# EAGLE board room-therm.0.1.2 (EAGLE 7.6.0)
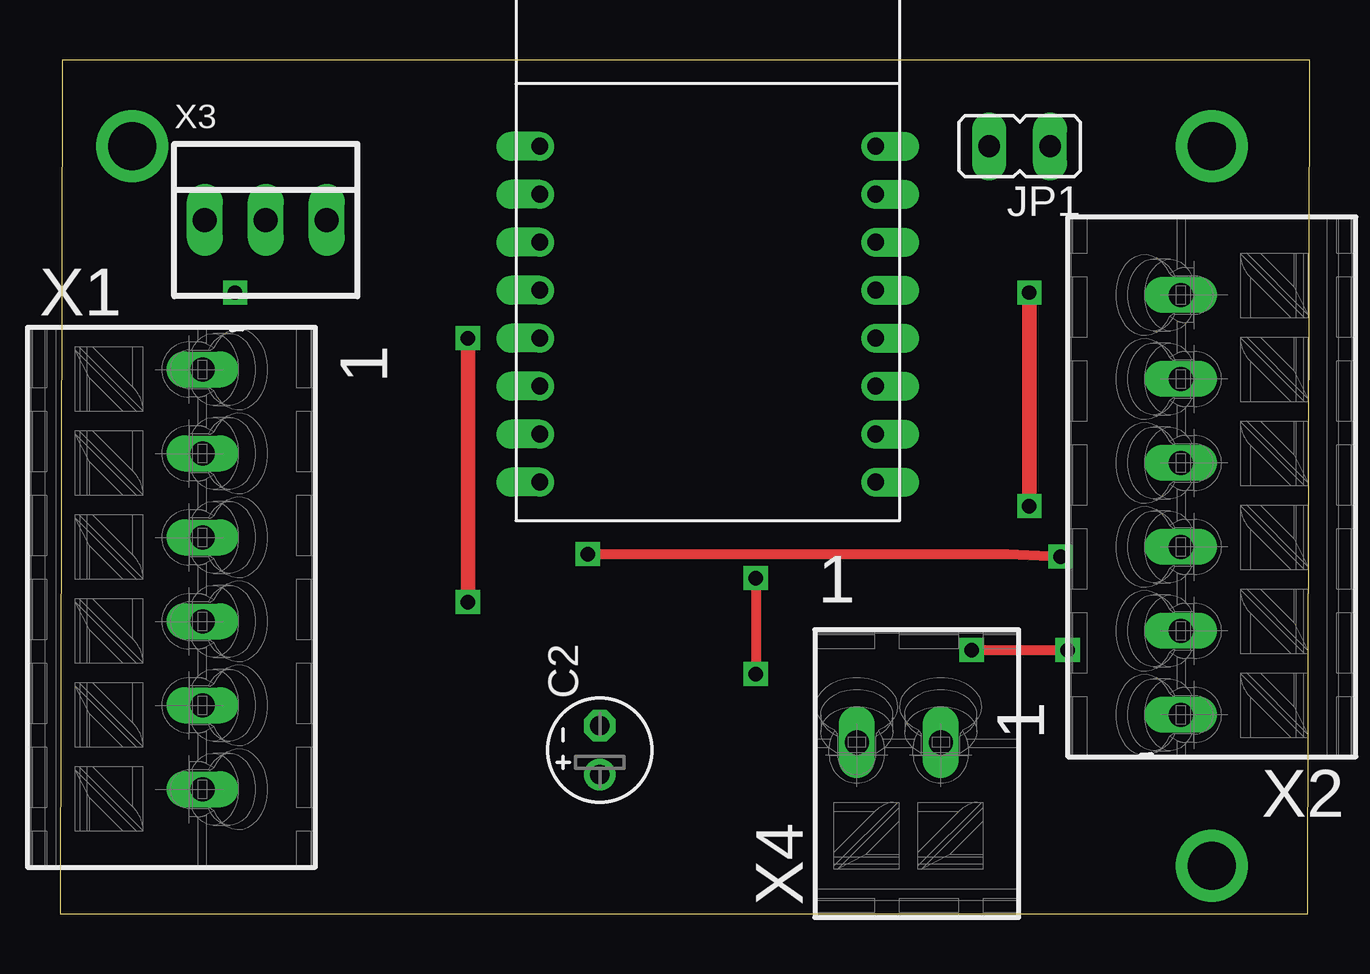
[diagram p0: board, top side]
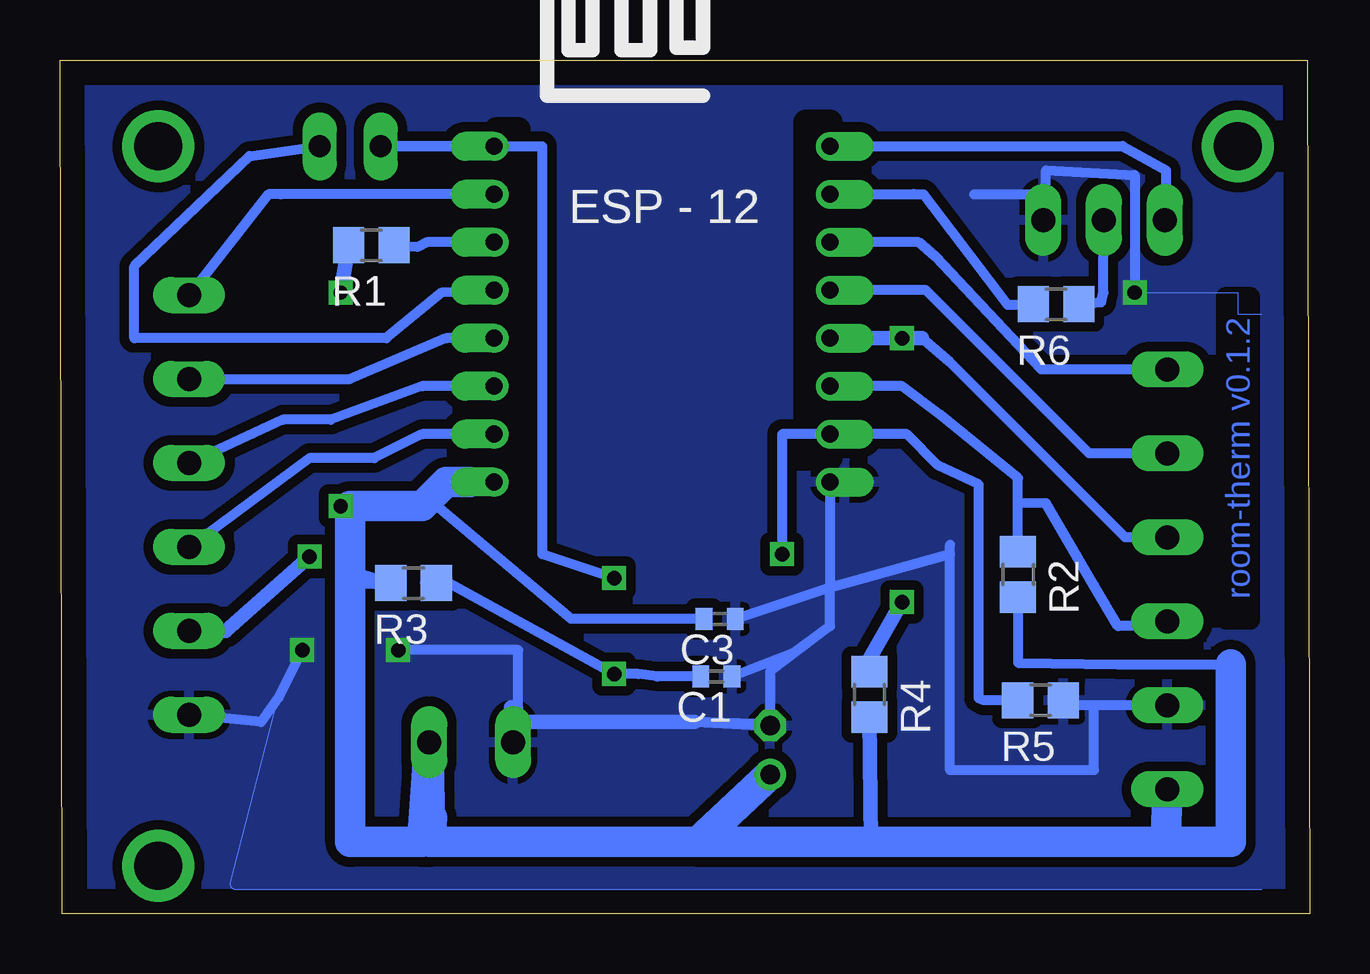
[diagram p1: board, bottom side, seen from below]

Size 52.1 x 35.6 mm. Coordinates in mm from the lower left corner, seen from the top.
Outline: 0,0 52,0 52.1,35.6 0.1,35.6 0,0
Copper layers (1*16): Top 0.035mm / dielectric 1.5mm / Bottom 0.035mm
Design rules "default *": minimum track width 10mil, minimum drill 0.5mm, track to track 8mil, track to pad 8mil, pad to pad 8mil, via to via 8mil, smd to smd 8mil, copper to edge 40mil, drill to drill 8mil, minimum pad ring 10mil, minimum via ring 8mil, stop-mask expansion 4mil, vias tented up to drill 0mil, thermal gap 10mil
bRestrict: area 20,19 to 21,33; area 33,17 to 34,32.7

## Footprints (pad centres in the part's own frame; a part is rotated, then mirrored left to right if it is on the bottom)
C1005 = smd 0.7 x 0.9: 1 -0.65,0; 2 0.65,0
E2-4 = drill 0.813 pad 1.27: + -1.016,0 | drill 0.813 pad 1.27 octagon: - 1.016,0
JP1 = drill 0.914 long: 1 0,-1.27; 2 0,1.27
R0805 = smd 1.3 x 1.5: 1 -0.95,0; 2 0.95,0
ESP12 = drill 0.7 offset: ADC -7.1,3.8; CH_PD -7.1,1.8; GND 6.9,-8.2; GPIO0 6.9,-2.2; GPIO2 6.9,-4.2; GPIO4 6.9,1.8; GPIO5 6.9,-0.2; GPIO12 -7.1,-4.2; GPIO13 -7.1,-6.2; GPIO14 -7.1,-2.2; GPIO15 6.9,-6.2; GPIO16 -7.1,-0.2; RESET -7.1,5.8; RX 6.9,3.8; TX 6.9,5.8; VCC -7.1,-8.2
P-250-106 = drill 1 long: L1 1.3,9.5; L2 1.3,6; L3 1.3,2.5; L4 1.3,-1; L5 1.3,-4.5; L6 1.3,-8
22-23-2031 = drill 1 long: 1 -2.54,0; 2 0,0; 3 2.54,0
P-250-102 = drill 1 long: L1 1.3,2.5; L2 1.3,-1

## Placement (x,y rotation side)
C1  100n  [C1005]  24.74,9.9 180 bottom
C2  100u  [E2-4]  22.5,6.83 90 top
C3  100n  [C1005]  24.6,12.3 180 bottom
JP1  J1  [JP1]  40,32 90 top
R1  12k  [R0805]  39.12,27.88 180 bottom
R2  12k  [R0805]  12.17,14.15 270 bottom
R3  12k  [R0805]  37.36,13.79 180 bottom
R4  12k  [R0805]  18.36,9.15 270 bottom
R5  12k  [R0805]  11.23,8.91 180 bottom
R6  470  [R0805]  10.58,25.42 180 bottom
U$1  ESP12  [ESP12]  26.9,26.2 0 bottom
X1  250-106  [P-250-106]  4.64,13.2 0 top
X2  250-106  [P-250-106]  48.02,17.8 180 top
X3  22-23-2031  [22-23-2031]  8.58,28.93 0 top
X4  250-102  [P-250-102]  35.71,5.86 90 top

## Library data of the parts
C1 C3 = eagle-ltspice; SPICEMODEL: NONE; SPICEPREFIX: C
C2 = resistor
JP1 = jumper
R1-R6 = rcl
U$1 = esp8266modules
X1 X2 X4 = con-wago_250
X3 = con-molex; MF: MOLEX; MPN: 22-23-2031; OC_FARNELL: 1462950; OC_NEWARK: 30C0862

## Nets
A0: U$1.ADC X2.L6
D0: JP1.1 U$1.GPIO16
D1: U$1.GPIO5 X1.L2
D2: U$1.GPIO4 X1.L1
D3: R4.1 U$1.GPIO0 X1.L3
D4: R2.1 U$1.GPIO2 X1.L4
D5: U$1.GPIO14 X2.L5
D6: U$1.GPIO12 X2.L4
D7: U$1.GPIO13 X2.L3
D8: R5.2 U$1.GPIO15 X2.L2
D9: R6.2 U$1.RX
D10: U$1.TX X3.1
GND: C1.1 C2.- C3.1 R5.1 U$1.GND X1.L5 X2.L1 X3.3 X4.L1
N$3: C1.2 JP1.2 R3.1 U$1.RESET
N$4: R1.1 U$1.CH_PD
N$7: R6.1 X3.2
V+: C2.+ C3.2 R1.2 R2.2 R3.2 R4.2 U$1.VCC X1.L6 X4.L2

## Tracks (layer width: path | path; a pad name or v marks a point on that pad's centre or on a via)
A0
  Bottom 0.406: U$1.ADC 37.09,30.01 42.9,30 43.42,30 X2.L6
D0
  Bottom 0.406: U$1.GPIO16 36.2,25.9 38.5,24 49,24 49,27 44.2,31.6 JP1.1
D1
  Bottom 0.406: X1.L2 9.2,19.2 16,26 U$1.GPIO5
D2
  Bottom 0.406: X1.L1 11.2,22.7 15.6,27.4 16.3,28 U$1.GPIO4
D3  (via drill 0.6)
  Top 0.61: v17,13 v17,24
  Bottom 0.406: X1.L3 7.7,15.7 15,23 16.17,24 | R4.1 18.36,10.64
  Bottom 0.61: 18.36,10.64 v17,13 | U$1.GPIO0 v17,24 16.17,24
D4
  Bottom 0.406: X1.L4 5.94,12.06 6,12 8,12 9,13.7 11,17.13 12.17,17.1 | R2.1 12.17,17.1 | 12.17,17.1 12.17,18.17 15.4,20.8 17,22 U$1.GPIO2
D5
  Bottom 0.406: X2.L5 40,22.3 36,24 U$1.GPIO14
D6
  Bottom 0.406: U$1.GPIO12 37,22 40.8,20.6 42.8,20.6 46.7,18.8 X2.L4
D7
  Bottom 0.406: U$1.GPIO13 37,20 39,19 41.7,19 46.7,15.3 X2.L3
D8  (via drill 0.6)
  Top 0.406: v22,15 39.5,15 v41.7,14.9
  Bottom 0.406: R5.2 13.61,8.91 13.8,9 13.8,17.9 15.5,18.7 16.8,20 U$1.GPIO15 22,20 v22,15
  Bottom 0.61: X2.L2 45.2,11.8 v41.7,14.9
D9
  Bottom 0.406: U$1.RX 16.51,30.01 16.1,30 12.6,25.4 11.6,25.4 11.95,25 R6.2
D10
  Bottom 0.406: U$1.TX 7.81,32.01 6,31 6,28.97 X3.1
GND  (via drill 0.6)
  Top 0.406: v38,11 v42,11
  Bottom 0: v7.3,25.9 3,25.9 3,25 2,25 | 2,1 44.75,1 arc90 45,1.25 43,9
  Bottom 0.406: X1.L5 9,8.7 | 9,8.7 10.07,8.7 R5.1 | 9,8.7 9,6 15,6 15,15 | C3.1 20,13.6 | 20,13.6 15,15 | 15,15 15,15.39 | 20,12 20,13.6 | C2.- 25.65,8 22.5,7.9 22.5,10.1 20,12 | C1.1 21.5,10.9 20,12 | 11,30 X3.3 | U$1.GND 20,13.6 | 33.3,8.6 33,8.6 33,11 v38,11 | v42,11 43,9 43.72,8 X2.L1 | 14,30 11,30 | 11,30 11,31 7.3,30.8 v7.3,25.9
  Bottom 0.61: 25.65,8 33,8 33.3,8.6 X4.L1
  pour Bottom (isolate 0.406): 1,35 1,0 51,0 51,35
N$1  (via drill 2 pad 1.68)
  other vias: 48,32
N$2  (via drill 2 pad 1.27)
  other vias: 3,32
N$3  (via drill 0.6)
  Top 0.406: v29,14 v29,10
  Bottom 0.406: U$1.RESET JP1.2 | JP1.2 37,32 | C1.2 27.2,9.9 28,10 v29,10 35.9,13.8 36.7,13.8 | 36.9,13.8 36.7,13.8 | 36.7,13.8 R3.1 | JP1.2 32,32 32,15 v29,14
N$4
  Bottom 0.406: U$1.CH_PD 36.8,28 37.2,27.8 37.8,27.81 R1.1
N$5  (via drill 2 pad 2.54)
  other vias: 48,2
N$7
  Bottom 0.406: R6.1 9.58,25.42 8.7,25.5 8.6,25.9 X3.2
V+  (via drill 0.6)
  Top 0.61: v40.4,17 v40.4,25.9
  Bottom 0.406: X4.L2 36.61,7.61 36.6,4 | R2.2 12.17,10.47 8,10.4 3.3,10.4 | 6,4 6,5.14 X1.L6 | R3.2 39.7,14.2 | C3.2 30.8,12.3 36.4,17 37,17 | U$1.VCC 35,18
  Bottom 0.61: R4.2 18.3,3 | R3.2 40,13.9 | 40,17 v40.4,17 | v40.4,25.9 R1.2
  Bottom 1.27: 25.5,3 36.7,3 | 36.7,3 36.6,4 | C2.+ 25.5,3 | 25.5,3 18.3,3 6,3 | 36.7,3 X4.L2 37,3 40,3 40,13.9 40,17 37,17 36,18 35,18 | X1.L6 6,3 | 6,3 3.3,3 3.3,10.4

## Text on the board
Bottom: room-therm v0.1.2